# Altium PCB WDpcb1u20171121t1140.PcbDoc
Units mm, origin at the board's own origin, x right, y up, seen from the top; angles counter-clockwise.
Board outline 108 x 34 mm, 2 copper layers (Top Layer, Bottom Layer); 25 components, 0 nets, 88 pads, 37 vias.
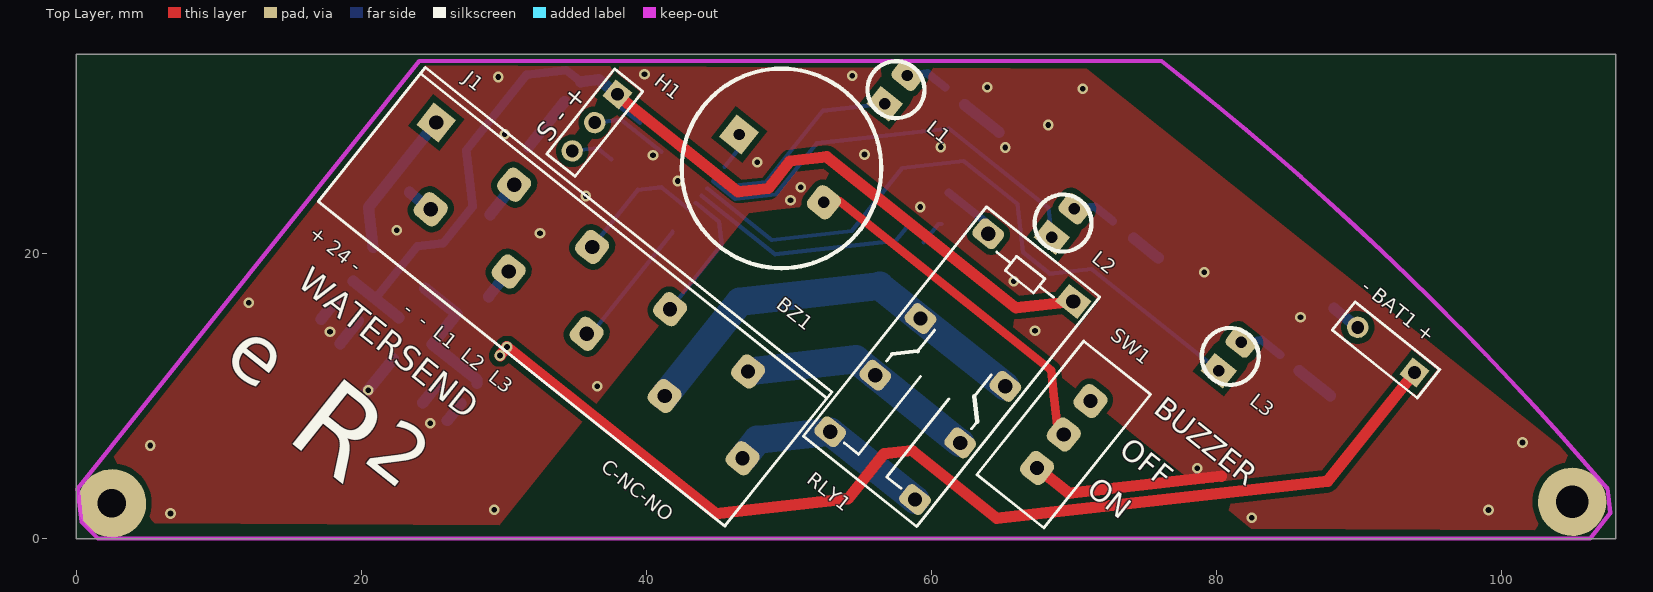
[diagram p0: Top Layer view]
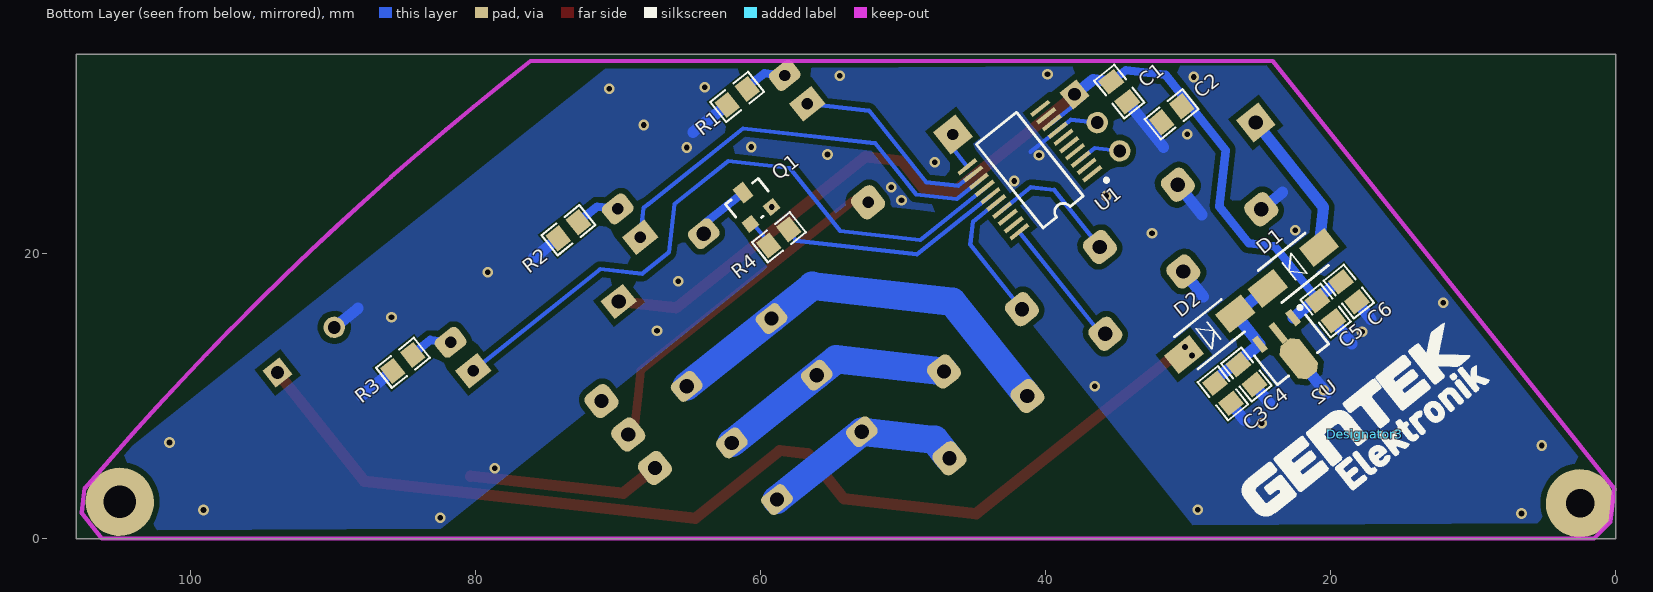
[diagram p1: Bottom Layer view, seen from below]

## Layer stack, top to bottom
Top Solder: solder mask 0.0102, Solder Resist, Dk 3.5
Top Layer: signal copper 0.0356
Dielectric 1: dielectric 0.32, FR-4, Dk 4.8
Bottom Layer: signal copper 0.0356
Bottom Solder: solder mask 0.0102, Solder Resist, Dk 3.5

## Board outline
0,0 108,0 108,34 0,34

## Design rules (kind name [scope] priority, off if disabled: settings)
Clearance [All] p1: gap=0.4
PolygonConnect [All] p1: connectstyle=Relief reliefconductorwidth=0.254 reliefentries=4 polygonreliefangle="90 Angle" airgapwidth=0.254
RoutingVias [All] p1: holewidth=0.711 width=1.27 viastyle="Through Hole" minholewidth=0.711 minwidth=1.27 maxholewidth=0.711 maxwidth=1.27
SolderMaskExpansion [All] p1: expansion=0.102
Width [All] p1: maxlimit=0.254 minlimit=0.254 preferedwidth=0.254
30 further rules are at their usual default settings.

## Components (designator, comment, footprint, x,y, rotation, side; value= is the part's Value field where it differs from the comment)
"- BAT1 +" "Comment" HDR1X3#1 93.878,11.676 r141.4 top
BZ1 "Comment" "piezo buzzer" 49.474,25.997 r231.4 top
C1 "CAP110050456E" C0805-N 34.827,31.385 r231.4 bottom (schematic designator C55)
C2 "CAP110050456E" C0805-N 31.156,29.798 r321.4 bottom (schematic designator C55)
C3 "CAP110050456E" C0805-N 27.553,10.221 r51.4 bottom (schematic designator C55)
C4 "CAP110050456E" C0805-N 25.905,11.536 r51.4 bottom (schematic designator C55)
C5 "CAP110050456E" C0805-N 20.35,16.017 r51.4 bottom (schematic designator C55)
C6 "CAP110050456E" C0805-N 18.718,17.352 r51.4 bottom (schematic designator C55)
D1 "SMAJ33CA" DO-214AC(SMA) 22.616,19.018 r321.4 bottom (schematic designator D7)
D2 "SMAJ33CA" DO-214AC(SMA) 28.487,14.364 r141.4 bottom (schematic designator D7)
Designator3 "Comment" "GENTRK ELEKTRONIK" 17.606,7.361 r141.4 bottom
H1 "Comment" HDR1X3#2 37.957,31.193 r231.4 top
J1 "Comment" "10 pin Terminal sping loaded" 25.247,29.219 r321.4 top
L1 "Comment" "led 3mm" 57.506,31.521 r231.4 top
L2 "Comment" "led 3mm" 69.229,22.163 r231.4 top
L3 "Comment" "led 3mm" 80.952,12.805 r231.4 top
Q1 "TRS0BC817001" SOT-23 60.595,23.489 r141.4 bottom (schematic designator Q3)
R1 "CAP110050319E" C0805-N 61.635,31.012 r321.4 bottom (schematic designator C54)
R2 "CAP110050319E" C0805-N 73.474,21.659 r321.4 bottom (schematic designator C54)
R3 "CAP110050319E" C0805-N 85.091,12.353 r321.4 bottom (schematic designator C54)
R4 "CAP110050319E" C0805-N 58.71,21.159 r321.4 bottom (schematic designator C54)
RLY1 "Comment" "relay 5v tetecom" 61.412,12.089 r141.4 top
SW1 "Comment" "Slide Switch" 69.28,7.326 r51.4 top
U1 "Comment" TSSOP20 36.714,25.631 r51.4 bottom
U2 "Comment" SOT89L 22.737,13.267 r231.4 bottom

## Footprints (in the part's own frame and the unit in brackets; to place one, negate y for a bottom-side part, rotate by r counter-clockwise, add the part's x,y. Pads: shape width x height; smd on the part's side, far side on the other; paste and mask are expansions set on the pad)
"10 pin Terminal sping loaded" [mm] "degson"
  rect 2x2 hole 1: 1(0,0)
  rrect50% 2x2 hole 1: 2(3.5,-5) 3(7,0) 4(10.5,-5) 5(14,0) 6(17.5,-5) 7(21,0) 8(24.5,-5) 9(28,0) 10(31.5,-5)
  silkscreen extent -3,-9.5 33.5,2.54
C0805-N [mm] "Chip Resistor, Body 2.0x1.3mm, IPC Medium Density"
  rect 1.2x1.4 smd: 1(-0.9,0) 2(0.9,0)
  silkscreen extent -1.7,-0.9 1.7,0.9, body extent -1.07,-0.7 1.07,0.7, height 1.55
DO-214AC(SMA) [mm]
  rect 2.3x1.68 smd: A(-2.3,0) K(2.3,0)
  silkscreen extent -2.16,-1.4 2.16,1.4
"GENTRK ELEKTRONIK" [mm]
  silkscreen extent -9.43,-2.58 9.2,2.64, body extent -9.43,-2.59 9.2,2.65, height 3
HDR1X3#1 [mm] "Connector; Header; 3 Position"
  rect 1.5x1.5 hole 0.9: 1(0,0)
  round 0 all layers, no hole: 2(2.54,0)
  round 1.5 hole 0.9: 3(5.08,0)
  silkscreen extent -1.27,-1.27 6.35,1.27
HDR1X3#2 [mm] "Connector; Header; 3 Position"
  rect 1.5x1.5 hole 0.9: 1(0,0)
  round 1.5 hole 0.9: 2(2.54,0) 3(5.08,0)
  silkscreen extent -1.27,-1.27 6.35,1.27
"led 3mm" [mm]
  rrect50% 1.6x2 hole 0.8: 1(-1.27,0)
  rect 1.6x2 hole 0.8: 2(1.27,0)
  silkscreen extent -2,-2 2,2
"piezo buzzer" [mm]
  rect 2x2 hole 0.8: 1(0,-3.81)
  rrect50% 2x2 hole 0.8: 2(0,3.81)
  silkscreen extent -7,-7 7,7
"relay 5v tetecom" [mm]
  rrect50% 2x1.6 hole 1: 1(3.81,-8.89) 4(3.81,-1.27) 6(3.81,3.81) 8(3.81,8.89) 9(-3.81,8.89) 11(-3.81,3.81) 13(-3.81,-1.27)
  rect 2x1.6 hole 1: 16(-3.81,-8.89)
  silkscreen extent -5.08,-10.3 5.08,10.3
"Slide Switch" [mm]
  rrect50% 2x2 hole 1: 1(-3,0) 2(0,0) 3(3,0)
  silkscreen extent -6,-3 6,3
SOT89L [mm] "SOT89, 3-Leads, Body 4.5x2.4 mm, Pitch 1.5mm, Lead Span 4.1mm, IPC High Density"
  oct 3x1.8 smd: 2(0.8,0)
  rect 1.6x0.5 smd: G(-1.5,0)
  rect 1.2x0.5 smd: I(-1.7,-1.5) O(-1.7,1.5)
  silkscreen extent -2.07,-2.3 1.3,2.42, body extent -1.3,-2.3 1.3,2.3, height 1.6
SOT-23 [mil]
  rect 36x36 smd: 1(-37.5,-40) 2(37.5,-40)
  rect 36x50 smd: 3(0.5,40)
  silkscreen extent -58,-45 57,45, body extent -60,-48 60,48, height 43
TSSOP20 [mm] "SO20 - 20 Leads; Body Width 7.5 mm; Pitch 1.27 mm"
  rect 0.3x1.6 smd: GND(3.9,0) NRST(1.95,0) PA2(2.6,0) PA3(3.25,0) PB0(5.85,0) PB1(5.85,6.55) PB2(5.2,6.55) PB3(4.55,6.55) PB4(3.9,6.55) PB5(3.25,6.55) PB6(2.6,6.55) PB7(1.95,6.55) PC4(0,6.55) PC5(0,0) PC6(0.65,0) PD0(5.2,0) SCL(0.65,6.55) SDA(1.3,6.55) SWIM(1.3,0) VCC(4.55,0)
  silkscreen extent -1.1,-0.6 6.67,5.07, body extent -0.39,0 6.2,6.5, height 1.4

## Part data
C1 C2 C3 C4 C5 C6: "CAP.0805 10uF 16V 10% X5R SAMSUNG"
D1 D2: "DIODE TVS 400W 33V DO214AC SMA"
Q1: "TRANSISTOR NPN 0.5A 45V SOT23 NXP"
R1 R2 R3 R4: "CAP.0805 10uF 25V 10% X5R"

## Free pads (board coordinates)
  round 4.8 hole 2: 0(2.5,2.5)
  round 4.8 hole 2.3: 0(104.95,2.607)

## Via types
v1: diameter 0.75, hole 0.4, Top Layer to Bottom Layer, tented both sides, 37 vias

## Nets (pads, with @x,y where several pads share a name; then routed paths per layer and width w, separated by ;. In a path a pad name is that pad's centre, name@x,y a point inside that pad or via, vN(x,y) a via of type N, cw(c..) or ccw(c..) an arc to the next point about the centre after c; other vN are vias at no path point)
pads on no net: "- BAT1 +.1" "- BAT1 +.2" "- BAT1 +.3" BZ1.1 BZ1.2 C1.1 C1.2 C2.1 C2.2 C3.1 C3.2 C4.1 C4.2 C5.1 C5.2 C6.1 C6.2 D1.A D1.K D2.A D2.K H1.1 H1.2 H1.3 J1.1 J1.2 J1.3 J1.4 J1.5 J1.6 J1.7 J1.8 J1.9 J1.10 L1.1 L1.2 L2.1 L2.2 L3.1 L3.2 Q1.1 Q1.2 Q1.3 R1.1 R1.2 R2.1 R2.2 R3.1 R3.2 R4.1 R4.2 RLY1.1 RLY1.4 RLY1.6 RLY1.8 RLY1.9 RLY1.11 RLY1.13 RLY1.16 SW1.1 SW1.2 SW1.3 U1.GND U1.NRST U1.PA2 U1.PA3 U1.PB0 U1.PB1 U1.PB2 U1.PB3 U1.PB4 U1.PB5 U1.PB6 U1.PB7 U1.PC4 U1.PC5 U1.PC6 U1.PD0 U1.SCL U1.SDA U1.SWIM U1.VCC U2.2 U2.G U2.I U2.O
copper on no net: | length 461.6
  Top Layer w0.6: 52.452,23.62 53.487,23.736 68.395,11.835 68.591,10.086 68.864,7.659 69.28,7.326
  Top Layer w0.8: v1(29.729,12.866) v1(30.212,13.47) 44.871,1.769 54.136,2.808 56.671,5.984 58.635,6.204 64.59,1.45 87.793,4.053 93.878,11.676 ; 37.93,31.159 46.451,24.357 48.548,24.592 50.085,26.517 52.655,26.806 65.927,16.21 69.935,16.66 ; 67.409,4.981 69.63,3.208 80.343,4.41
  Bottom Layer w0.3: 34.788,27.223 36.555,27.422 37.525,26.647 ; 35.804,14.394 36.156,14.433 41.833,21.545 ; 36.189,20.485 39.386,24.49 41.037,24.675 43.05,23.069 ; 36.373,29.208 38.224,29.416 39.147,28.679 41.048,27.162 ; 37.415,30.893 39.553,29.187 ; 41.659,16.118 45.278,20.65 45.096,22.267 43.455,23.577 ; 43.861,24.085 49.019,19.967 57.494,20.918 58.212,21.817 ; 44.266,24.593 48.805,20.97 54.414,21.599 57.948,26.026 62.267,26.51 66.039,23.499 66.419,20.108 68.305,18.603 71.241,18.932 80.16,11.812 ; 44.672,25.101 46.244,23.845 49.084,24.164 51.952,27.757 61.233,28.798 67.83,23.532 68.206,23.232 68.437,21.17 ; 45.077,25.609 46.125,24.772 48.373,25.024 52.379,30.042 56.714,30.529 ; 45.483,26.117 46.594,27.509 46.497,28.374 ; 59.462,20.819 60.464,22.074 60.706,22.101
  Bottom Layer w0.6: 20.978,16.845 23.918,20.528 25.739,20.732 27.799,23.313 27.354,27.275 31.585,32.575 34.385,32.889 35.389,32.088 ; 58.299,32.514 59.718,32.673 60.955,31.685 ; 61.219,24.291 63.897,22.153 63.98,21.414 ; 70.022,23.155 71.44,23.315 72.716,22.296 ; 81.744,13.797 83.163,13.956 84.478,12.907
  Bottom Layer w0.8: 17.172,15.416 18.156,16.649 ; 18.502,13.703 19.788,15.314 ; 19.44,18.074 22.625,15.531 ; v1@20.303,10.218 22.238,12.641 ; 20.818,20.453 20.502,23.274 25.247,29.219 ; 23.374,24.316 24.863,23.128 ; 24.318,9.548 25.344,10.832 ; 24.449,17.588 26.69,15.799 24.984,13.661 24.969,13.659 28.086,11.171 28.114,10.924 ; 26.029,8.312 26.991,9.517 ; 28.933,17.006 30.334,18.761 ; 29.037,22.746 30.718,24.852 ; 31.721,27.494 34.266,30.681 ; 35.389,32.088 36.658,32.23 37.957,31.193 ; 62.339,30.45 64.732,28.54 ; 74.178,21.097 75.896,19.725 ; 85.794,11.791 87.969,10.055 ; 88.241,16.176 89.908,14.845
  Bottom Layer w2: 41.275,10.026 46.562,16.65 56.358,17.749 59.226,15.459 65.181,10.705 ; 46.746,5.659 47.772,6.945 52.888,7.519 58.843,2.765 ; 47.13,11.75 54.67,12.596 56.057,11.489 62.012,6.735
  other v1: 82.46,1.485 6.611,1.778 99.081,2.03 29.316,2.048 78.637,4.96 5.189,6.553 101.46,6.761 24.839,8.125 20.477,10.437 36.551,10.703 17.796,14.528 67.254,14.599 85.885,15.553 12.089,16.58 65.778,18.084 79.127,18.708 32.525,21.457 22.473,21.649 59.217,23.289 50.104,23.772 35.739,24.059 50.817,24.666 42.2,25.109 47.764,26.42 40.461,26.92 55.293,26.975 65.178,27.469 60.655,27.504 30.066,28.393 68.184,29.044 70.608,31.585 63.908,31.7 29.598,32.406 54.438,32.5 39.86,32.6

## Polygon pours and split planes (outlines as drawn)
no net on Bottom Layer "Bottom Layer-No Net" (solid, pour order 2): 0.101,3.53 24.283,33.822 70.201,33.558 106.582,4.516 106.591,4.517 cw(c105.061,2.6) 107.499,2.873 107.618,1.809 106.664,0.614 cw(c105.437,1.593) 105.612,0.033 83.15,0.151 53.769,23.605 48.775,23.045 47.161,22.864 29.242,0.417 1.221,0.556 0.363,1.192
no net on Top Layer "Bottom Layer-No Net" (solid, pour order 2): 0.101,3.53 24.283,33.822 70.201,33.558 106.582,4.516 106.591,4.517 cw(c105.061,2.6) 107.499,2.873 107.618,1.809 106.664,0.614 cw(c105.437,1.593) 105.612,0.033 83.15,0.151 53.769,23.605 48.775,23.045 47.161,22.864 29.242,0.417 1.221,0.556 0.363,1.192

## Keep-outs
Keep-Out Layer:
  lines w0.3: 24.054,33.534 0.101,3.53 0.363,1.192 1.519,0.037 106.203,0.037 107.618,1.809 107.421,3.562 ; 24.058,33.531 76.137,33.531 cw(c-59.135,-138.824) 107.404,3.547
  text "GENTEK" at 70.02,28.538 h3 r321.4

## Silkscreen, mask and mechanical layers (free items; w line width, h text height)
Top Overlay:
  text "S - +" at 33.173,27.765 h1.3 r51.4
  text "+ 24 -" at 16.225,21.259 h1 r321.4
  text "WATERSEND" at 15.058,17.392 h3 r321.4
  text "-  -  L1  L2  L3" at 22.868,15.956 h1 r321.4
  text "e" at 9.325,11.413 h7 r321.4
  text "BUZZER" at 75.483,8.907 h1.5 r321.4
  text "OFF" at 73.074,6.053 h1.5 r321.4
  text "R" at 13.352,5.638 h10 r321.4
  text "C-NC-NO" at 36.74,4.882 h1 r321.4
  text "2" at 19.171,4.512 h7 r321.4
  text "ON" at 70.8,3.285 h1.5 r321.4